# Altium PCB main_board.PcbDoc (part 2 of 3)
Units mm, origin at the board's own origin, x right, y up, seen from the top; angles counter-clockwise.
Board outline 156 x 135 mm, 4 copper layers (Top Side, Ground Plane, Power Plane, Bottom Side), stack 1.602 mm thick; 329 components, 291 nets, 1334 pads, 943 vias.
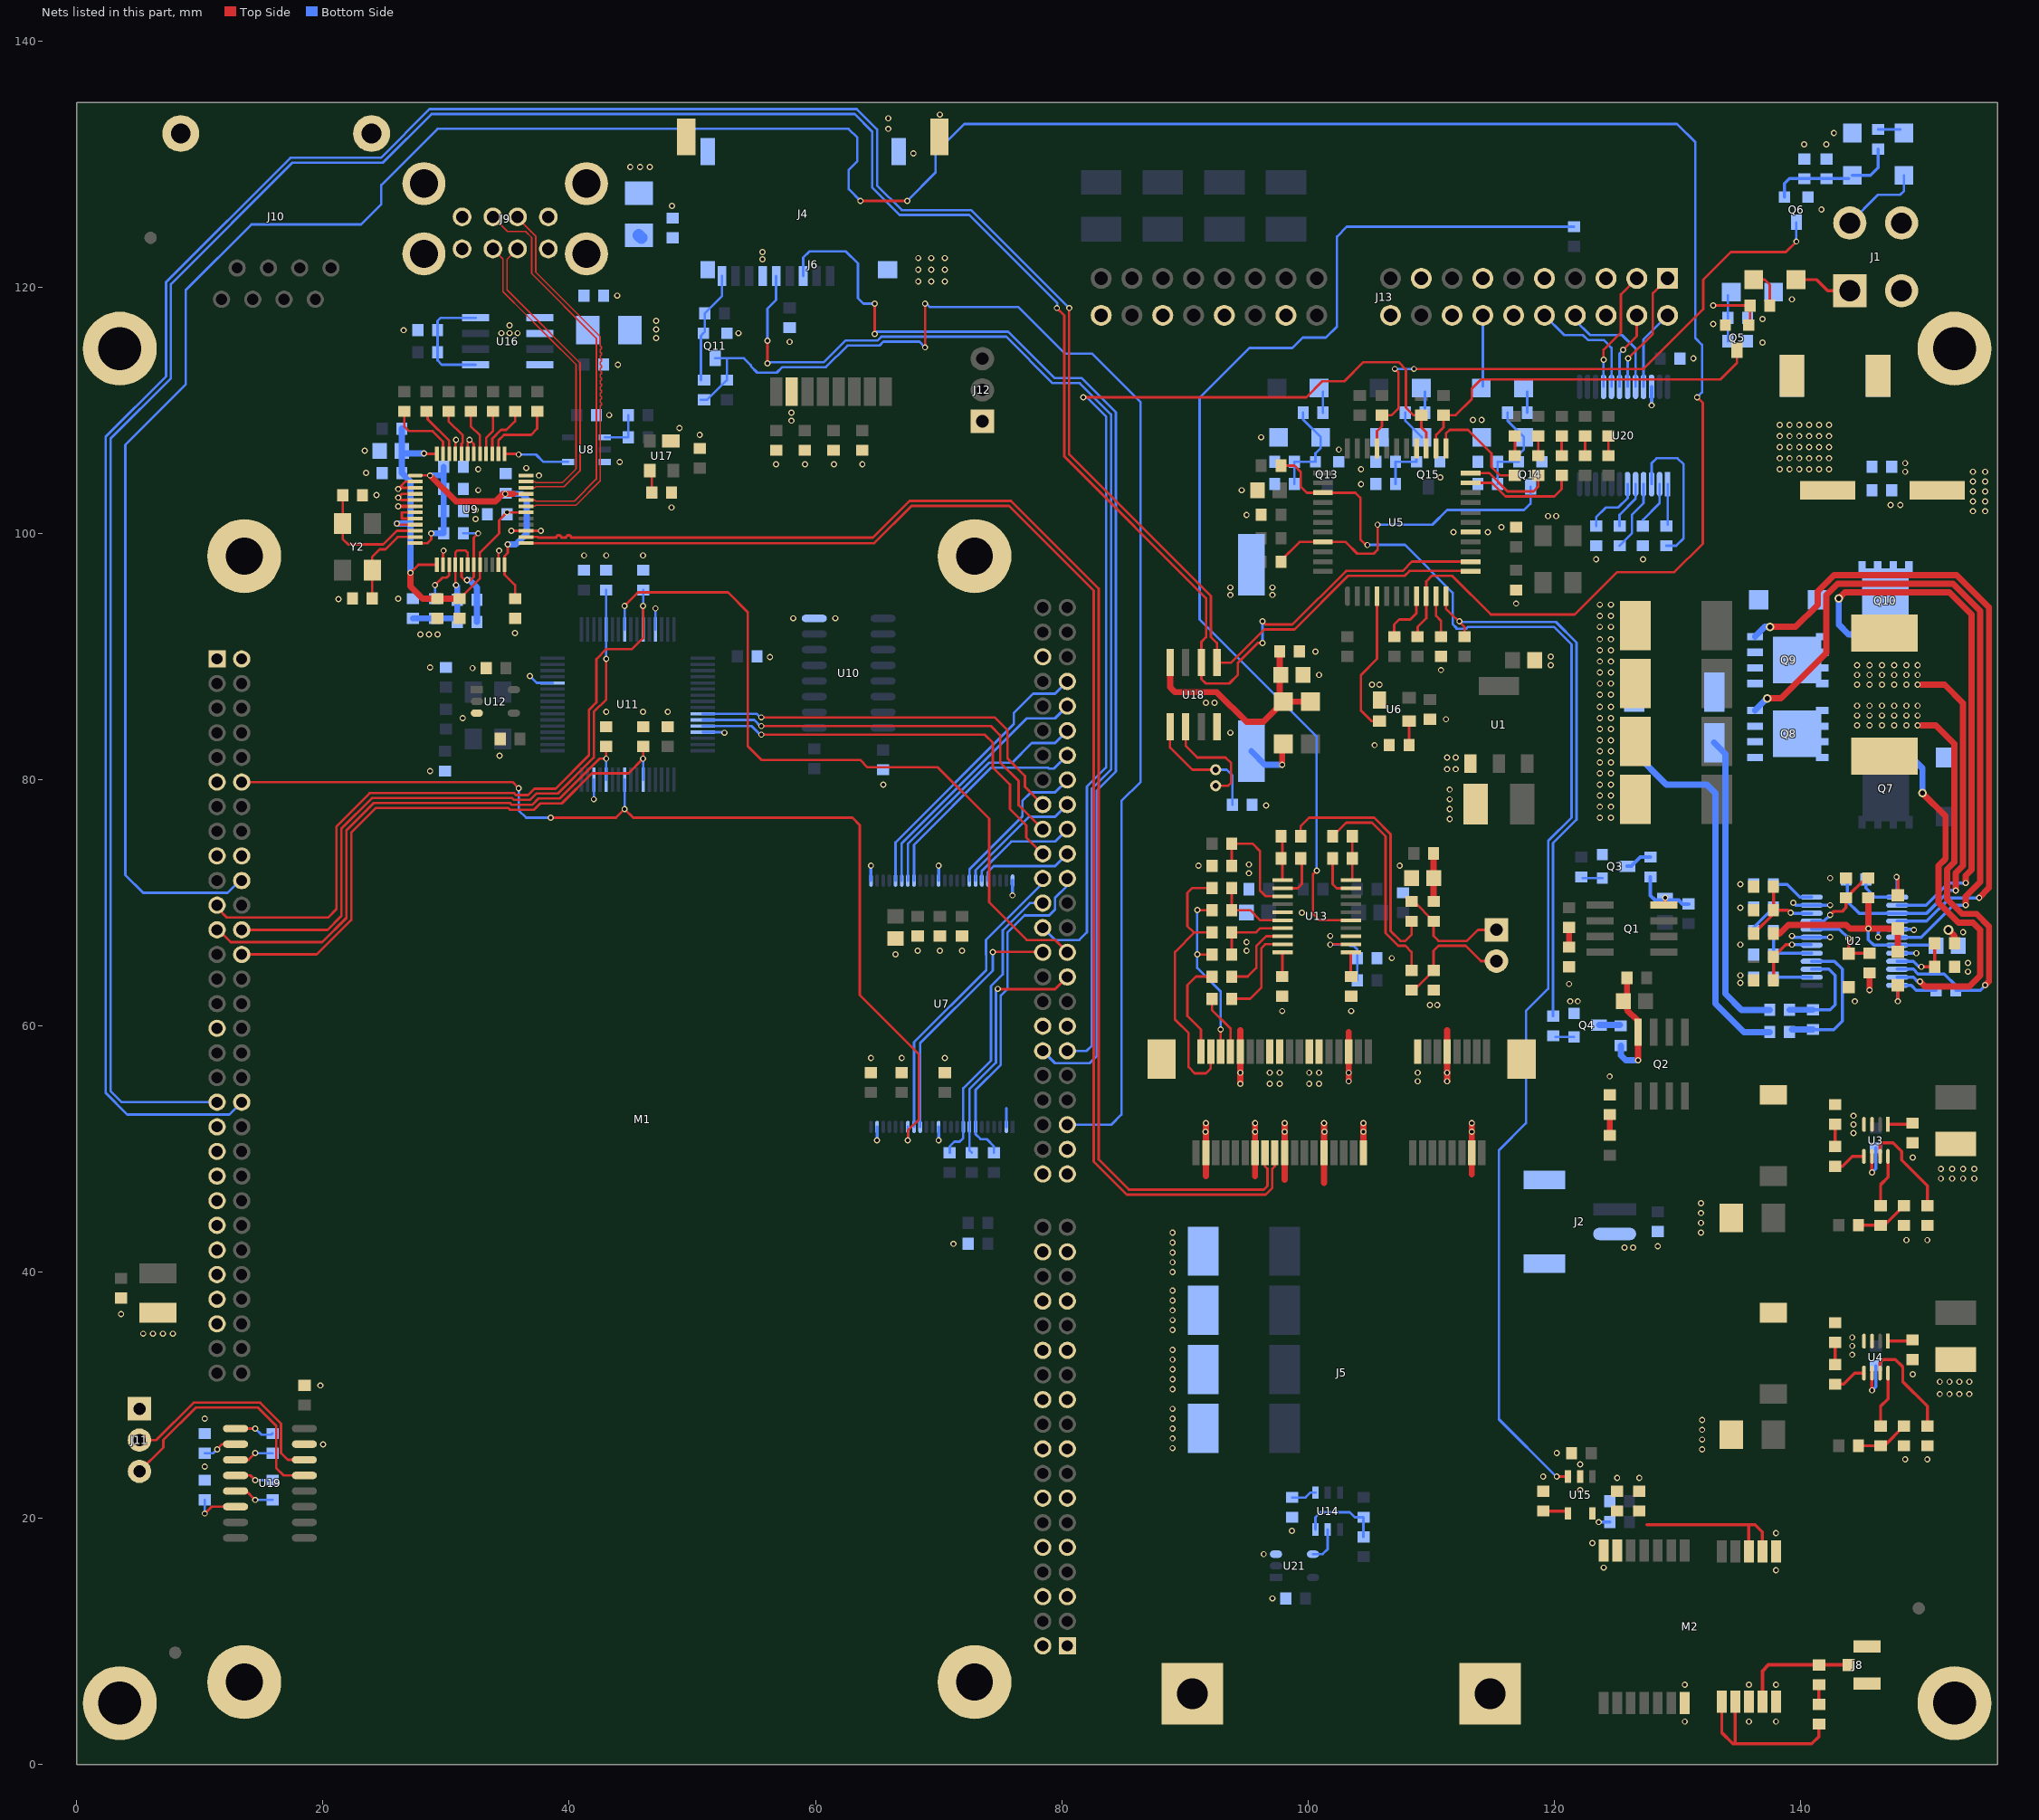
[diagram p4: the nets of this part, all layers, seen from the top]

## Via types
v1: diameter 0.5, hole 0.3, Top Side to Bottom Side, tented both sides, 937 vias
v2: diameter 0.7, hole 0.4, Top Side to Bottom Side, tented both sides, 4 vias
v3: diameter 0.8, hole 0.5, Top Side to Bottom Side, tented both sides, 1 vias
v4: diameter 0.5, hole 0.3, Top Side to Bottom Side, 1 vias

## Nets (pads, with @x,y where several pads share a name; then routed paths per layer and width w, separated by ;. In a path a pad name is that pad's centre, name@x,y a point inside that pad or via, vN(x,y) a via of type N, cw(c..) or ccw(c..) an arc to the next point about the centre after c; other vN are vias at no path point) (continued)
EBID5: M1.B32 U11.58 | length 32.5
  Top Side w0.2: v1(55.6,85.05) 74.55,85.05 75.6,84 75.6,81.7 77,80.3 77,79.424 M1.B32@78.452,77.972
  Bottom Side w0.2: U11.58@50.85,85.35 55.222,85.35 55.522,85.05 v1(55.6,85.05)
EBID6: M1.B30 U11.59 | length 33.7
  Top Side w0.2: v1(55.6,84.35) 74.25,84.35 75,83.6 75,81.4 76.5,79.9 76.5,77.924 M1.B30@78.452,75.972
  Bottom Side w0.2: U11.59@50.85,84.85 55.022,84.85 55.522,84.35 v1(55.6,84.35)
EBID7: M1.B28 U11.60 | length 34.8
  Top Side w0.2: v1(55.6,83.65) 73.75,83.65 74.4,83 74.4,81 75.8,79.6 75.8,77.6 77.124,76.276 77.124,75.3 M1.B28@78.452,73.972
  Bottom Side w0.2: U11.60@50.85,84.35 54.822,84.35 55.522,83.65 v1(55.6,83.65)
EBIOE: M1.B19 U11.40 | length 60.8
  Top Side w0.2: v1(44.5,94.1) 45.6,95.2 52.9,95.2 54.5,93.6 54.5,82.7 55.6,81.6 63.634,81.6 64.234,81 69.934,81 74.1,76.834 74.1,70.034 77.162,66.972 79.452,66.972 M1.B19@80.452,65.972
  Bottom Side w0.2: U11.40@44.5,92.2 v1(44.5,94.1)
EBIWE: M1.A12 U7.18 U11.9 | length 84.7
  Top Side w0.2: M1.A12@13.4,79.8 35.4,79.8 v1(35.9,79.3) ; v1(38.5,76.9) 43.8,76.9 v1(44.5,77.6) 45.2,76.9 63,76.9 63.6,76.3 63.6,62.5 68.4,57.7 68.4,52.4 67.5,51.5 v1(67.5,50.7)
  Bottom Side w0.2: v1(35.9,79.3) 35.9,77.5 36.5,76.9 v1(38.5,76.9) ; v1(44.5,77.6) U11.9@44.5,80 ; v1(67.5,50.7) U7.18@67.5,51.8
EMPTY: D23.1 J13.14 | length 5.8
  Bottom Side w0.2: D23.1@114.2,111.929 J13.14@114.2,117.7
EMPTY-SIG: Q14.1 R55.2 U5.41 | length 25.6
  Top Side w0.2: R55.2@97.8,97.7 97.8,97.8 99.3,99.3 U5.41@101.2,99.3 103.05,99.3 104,98.35 105.35,98.35 105.65,98.65 v1(105.65,100.7)
  Bottom Side w0.2: v1(105.65,100.7) 110.1,100.7 111.3,101.9 117.55,101.9 118.065,102.415 Q14.1@118.065,103.768
EUARTA-INT: M1.A26 R84.1 U11.6 | length 46.2
  Top Side w0.2: M1.A26@13.4,65.8 19.5,65.8 22.3,68.6 22.3,75.7 24.3,77.7 35.025,77.7 35.175,77.55 37.147,77.55 37.663,78.066 39.397,78.066 41.831,80.5 44.8,80.5 v1(46,81.7) R84.1@46,82.7
  Bottom Side w0.2: U11.6@46,80 v1(46,81.7)
EUARTB-INT: M1.A23 R85.1 U11.12 | length 45.2
  Top Side w0.2: M1.A23@11.4,67.8 11.5,67.8 12.5,66.8 19.934,66.8 21.9,68.766 21.9,75.866 24.134,78.1 35.191,78.1 35.341,77.95 36.981,77.95 37.497,78.466 39.231,78.466 42.466,81.7 v1(43,81.7) R85.1@43,82.7
  Bottom Side w0.2: U11.12@43,80 v1(43,81.7)
EUARTC-INT: M1.A24 R86.1 U11.37 | length 52.7
  Top Side w0.2: M1.A24@13.4,67.8 20.369,67.8 21.5,68.931 21.5,76.031 23.969,78.5 35.357,78.5 35.506,78.35 36.816,78.35 37.331,78.866 39.066,78.866 42,81.8 42,85.5 43,86.5 v1(43,89.8)
  Bottom Side w0.2: v1(43,89.8) U11.37@43,92.2 R86.1@43,95.4
EUARTD-INT: M1.A21 R87.1 U11.43 | length 58.6
  Top Side w0.2: M1.A21@11.4,69.8 11.4,69.6 12.2,68.8 20.4,68.8 21.1,69.5 21.1,76.197 23.803,78.9 35.522,78.9 35.672,78.75 36.65,78.75 37.166,79.266 38.9,79.266 41.6,81.966 41.6,85.666 42.2,86.266 42.2,89.778 43.022,90.6 45.1,90.6 46,91.5 v1(46,94.1)
  Bottom Side w0.2: U11.43@46,92.2 v1(46,94.1) R87.1@46,95.4
EXTUSB1_N: J5.36 U9.25 | length 115.4
  Top Side w0.2: U9.25@36.5,99.2 64.766,99.2 67.8,102.234 75.716,102.234 82.6,95.35 82.6,48.984 85.284,46.3 96.566,46.3 97.1,46.834 97.1,48.4 97.3,48.6 J5.36@97.3,49.7
EXTUSB1_P: J5.38 U9.26 | length 115.1
  Top Side w0.2: U9.26@36.5,99.7 37.422,99.7 37.472,99.65 38.95,99.65 cw(c39.15,99.65) 39.35,99.65 39.75,99.65 cw(c39.95,99.65) 40.15,99.65 40.55,99.65 40.95,99.65 41.35,99.65 41.75,99.65 42.15,99.65 42.55,99.65 42.95,99.65 43,99.65 64.65,99.65 67.634,102.634 75.881,102.634 83,95.516 83,49.15 85.45,46.7 94.15,46.7 96.4,46.7 96.7,47 96.7,48.4 96.5,48.6 J5.38@96.5,49.7
EXTUSB3_N: J9.6 U9.31 | length 32.1
  Top Side w0.127: J9.6@35.8,125.7 35.8,125.63 37.277,124.153 37.277,123.527 37.275,123.525 37.275,121.226 42.527,115.973 42.527,115.2 cw(c42.496,115.073) 42.527,114.946 42.527,114.692 cw(c42.496,114.565) 42.527,114.438 42.527,114.184 cw(c42.496,114.057) 42.527,113.93 42.527,113.676 cw(c42.496,113.549) 42.527,113.422 42.527,113.168 cw(c42.496,113.041) 42.527,112.914 42.527,112.66 cw(c42.496,112.533) 42.527,112.406 42.527,112.152 cw(c42.496,112.025) 42.527,111.898 42.527,111.644 cw(c42.496,111.517) 42.527,111.39 42.527,111.136 cw(c42.496,111.009) 42.527,110.882 42.527,110.628 cw(c42.496,110.501) 42.527,110.374 42.527,110.12 42.527,109.866 42.527,109.612 42.527,109.358 42.527,109.104 42.527,108.85 42.527,108.596 42.527,108.4 42.527,104.265 40.549,102.287 37.286,102.287 37.2,102.2 U9.31@36.5,102.2
EXTUSB3_P: J9.7 U9.32 | length 32.1
  Top Side w0.127: J9.7@33.8,125.7 34.977,124.523 36.445,124.523 36.95,124.018 36.948,124.015 36.948,121.09 36.95,121.088 42.2,115.838 42.2,104.4 40.414,102.614 37.286,102.614 37.2,102.7 U9.32@36.5,102.7
EXTUSB4_N: J9.2 U9.34 | length 25.8
  Top Side w0.127: J9.2@35.8,123.1 34.95,122.25 34.95,119.762 36.111,118.601 40.877,113.835 40.877,105.078 39.585,103.787 37.286,103.787 37.2,103.7 U9.34@36.5,103.7
EXTUSB4_P: J9.3 U9.35 | length 25.2
  Top Side w0.127: J9.3@33.8,123.1 34.623,122.277 34.623,119.627 36.548,117.702 37.626,116.624 38.137,116.113 40.55,113.7 40.55,105.214 39.45,104.114 37.286,104.114 37.2,104.2 U9.35@36.5,104.2
FLASH-DB0: M1.B41 U7.29 | length 23
  Bottom Side w0.2: U7.29@66.5,71.8 66.5,74.897 76.1,84.497 76.1,85.4 77.672,86.972 79.452,86.972 M1.B41@80.452,87.972
FLASH-DB1: M1.B39 U7.30 | length 21.1
  Bottom Side w0.2: U7.30@67,71.8 67,74.831 77.141,84.972 79.452,84.972 M1.B39@80.452,85.972
FLASH-DB2: M1.B37 U7.31 | length 19.7
  Bottom Side w0.2: U7.31@67.5,71.8 67.5,74.766 74.106,81.372 75.972,81.372 77.572,82.972 78.038,82.972 79.452,82.972 M1.B37@80.452,83.972
FLASH-DB3: M1.B35 U7.32 | length 18.4
  Bottom Side w0.2: U7.32@68,71.8 68,74.7 74.272,80.972 78.866,80.972 78.938,80.9 79.38,80.9 M1.B35@80.452,81.972
FLASH-DB4: M1.B33 U7.41 | length 12.6
  Bottom Side w0.2: U7.41@72.5,71.8 72.5,72.697 76.8,76.997 76.8,78.266 77.506,78.972 79.452,78.972 M1.B33@80.452,79.972
FLASH-DB5: M1.B31 U7.42 | length 10.5
  Bottom Side w0.2: U7.42@73,71.8 73,72.631 77.341,76.972 79.452,76.972 M1.B31@80.452,77.972
FLASH-DB6: M1.B29 U7.43 | length 9.1
  Bottom Side w0.2: U7.43@73.5,71.8 73.5,72.566 75.906,74.972 79.452,74.972 M1.B29@80.452,75.972
FLASH-DB7: M1.B27 U7.44 | length 7.8
  Bottom Side w0.2: U7.44@74,71.8 74,72.5 74.472,72.972 79.452,72.972 M1.B27@80.452,73.972
GND: BT1.2 C3.1 C4.1 C5.2 C6.1 C7.1 C8.2 C9.2 C10.2 C11.2 C12.2 C13.2 C17.1 C18.1 C19.2 C21.1 C22.1 C23.1 C24.1 C25.2 C26.2 C28.1 C29.2 C31.2 C32.1 C33.1 C34.1 C35.2 C36.1 C37.1 C38.1 C39.1 C40.2 C41.1 C42.1 C43.1 C44.1 C45.1 C46.1 C47.1 C48.1 C49.1 C50.1 C51.1 C52.1 C53.1 C54.1 C55.1 C56.1 C57.1 C58.1 C59.1 C62.1 C63.1 C64.1 C65.1 C66.2 C67.2 C68.1 C69.1 C70.1 C71.1 C72.2 C73.1 C74.1 C75.2 C76.2 C77.2 C78.2 C79.2 C80.2 C81.2 C82.2 C83.2 C86.2 C87.2 C88.1 C90.1 C91.1 C96.2 C97.2 C98.2 C99.2 C100.2 C101.1 C102.2 C103.2 C104.2 C105.2 C106.2 C107.2 C108.2 C109.2 C111.2 C112.2 C114.2 C118.2 C120.2 C124.2 C125.2 C126.2 D2.2 D3.2 D4.2 D6.2 D8.2 D11.2 D22.2 D24.2 D26.2 Designator1. Designator2. Designator3. Designator4. J1.4 J2. J2.1 J4. J4.6 J4.10 J5. J5.4 J5.9 J5.15 J5.18 J5.21 J5.26 J5.27 J5.29 J5.34 J5.35 J5.37 J5.40 J5.43 J5.50 J5.M5 J5.M6 J6.4 J6.@49.51,132.2 J6.@70.06,132.2 J8.2 J8.3 J9.4 J9.8 J9.9 J9.10 J9.11 J9.12 J10.9 J10.10 J11.1 J12.1 J13.5 J13.6 J13.9 J13.12 J13.13 J13.16 J13.17 J13.20 J13.24 J13.28 J13.32 J13.36 L6.2 L11.2 M1.A1 M1.A2 M1.A11 M1.A17 M1.A18 M1.A31 M1.A39 M1.A41 M1.A43 M1.A45 M1.A47 M1.A49 M1.A51 M1.A53 M1.A55 M1.B1 M1.B2 M1.B3 M1.B44 M1.C1 M1.C2 M1.C5 M1.C6 M1.C9 M1.C10 M1.C13 M1.C14 M1.C17 M1.C18 M1.C21 M1.C22 M1.C25 M1.C26 M1.C29 M1.C30 M1.C33 M1.C34 M1.M1 M1.M2 M1.M3 M1.M4 M2.7 M2.10 M2.12 M2.13 M2.24 Q3.3 Q4.3 Q5.3 Q6.3 Q11.3 Q13.3 Q14.3 Q15.3 R8.1 R14.2 R16.2 R22.2 R24.1 R27.2 R28.1 R30.1 R33.1 R35.2 R39.2 R57.2 R66.1 R84.2 R85.2 R86.2 R87.2 R91.1 R92.2 R99.2 R108.2 R112.1 R114.2 R116.2 R118.2 R120.2 U1.1 U2.7 U2.11 U2.17 U2.20 U3.4 U4.4 U5.16 U6.1 U7.2 U7.13 U7.23 U7.25 U7.36 U7.48 U8.3 U9.2 U9.3 U9.4 U9.5 U9.6 U9.14 U9.23 U9.27 U9.36 U9.42 U9.43 U9.45 U10.8 U11.14 U11.28 U11.45 U11.61 U12.3 U13.3 U13.15 U15.2 U16.6 U17.1 U18.4 U19.15 U20.22 U21.3 | length 110.9
  Top Side w0.2: U9.5@27.5,102.7 26.3,102.7 v1(26.1,102.9) 26.4,103.2 U9.4@27.5,103.2 ; U9.3@27.5,103.7 26.2,103.7 26.7,104.2 U9.2@27.5,104.2 ; U9.14@29.75,97.45 v1@29.75,98.55 ; U9.45@30.75,106.45 30.75,107.55 v1(30.8,107.6) ; U9.43@31.75,106.45 31.75,107.45 v1(31.9,107.6) 32.25,107.25 U9.42@32.25,106.45 ; U9.23@34.25,97.45 v1@34.25,98.55 ; v1(35.3,100.2) U9.27@36.5,100.2 v1(37.7,100.2)
  Top Side w0.3: v1(26.1,102.2) U9.6@27.5,102.2
  Top Side w0.5: 91.7,47.8 J5.50@91.7,49.7 v1(91.7,52.1) ; v1@94.5,55.4 J5.43@94.5,57.9 94.5,59.65 ; 95.7,47.8 J5.40@95.7,49.7 v1(95.7,52.1) ; 98.1,47.5 J5.34@98.1,49.7 v1(98.1,52.1) ; 101.3,47.25 J5.26@101.3,49.7 v1(101.3,52.1) ; v1(103.3,55.5) J5.21@103.3,57.9 103.3,59.5 ; J5.18@104.5,49.7 v1(104.5,52.1) ; v1(111.3,55.5) v1(111.3,56.2) J5.9@111.3,57.9 111.3,59.65 ; 113.3,47.95 J5.4@113.3,49.7 v1(113.3,51.4) v1(113.3,52.1)
  Bottom Side w0.2: v1(36.8,88.4) 37.35,87.85 U11.28@38.65,87.85 ; v1(42,78.4) U11.14@42,80 ; U11.45@47,92.2 v1(47,93.9) ; U11.61@50.85,83.85 52.55,83.85 v1(52.6,83.8)
  Bottom Side w0.254: U7.25@64.5,71.8 v1(64.5,73) ; v1(65,50.7) U7.23@65,51.8 ; v1(70,50.7) U7.13@70,51.8 ; U7.36@70,71.8 v1(70,73) ; U7.2@75.5,51.8 75.5,53.3 ; v1(76,70.6) U7.48@76,71.8 ; v1(139.3,67.3) 139.4,67.2 U2.7@140.9,67.2 v1(142.4,67.2) ; v1(139.4,70) 139.6,69.8 U2.11@140.9,69.8 v1(142.4,69.8) ; v1(146.3,67.2) 146.3,67.6 146.55,67.85 U2.17@147.85,67.85 149.15,67.85 v1(149.2,67.8) ; U2.20@147.85,65.9 v1(149.4,65.9)
  Bottom Side w0.3: v1(127.9,110.4) U20.22@127.9,111.9
  Bottom Side w0.508: R30.1@126.5,83 126.5,82.2 129.1,79.6 132.4,79.6 133.1,78.9 133.1,61.8 135.4,59.5 R24.1@137.5,59.5
  other v1: 130.6,3.5 135.8,3.5 138,3.5 130.6,6.5 135.8,6.5 138,6.5 97.1,13.5 138,15.8 124,16 96.4,17.1 123.1,18 138,18.8 98.7,19 122.1,22.3 125.1,23.3 126.9,23.3 119.1,23.4 10.4,24.2 122.1,24.4 148.5,24.8 150.3,24.8 120.2,25.3 132,25.6 89,25.7 20,26 132,26.4 89,26.5 132,27.2 89,27.3 132,28 10.4,28.1 89,28.1 89,28.9 151.3,30.1 152.1,30.1 152.9,30.1 153.7,30.1 89,30.5 19.8,30.8 151.3,31.1 152.1,31.1 152.9,31.1 153.7,31.1 89,31.3 149.1,31.7 89,32.1 89,32.9 144.2,33.3 89,33.7 144.2,34 144.2,34.7 5.4,35 6.2,35 7,35 7.8,35 89,35.3 89,36.1 3.6,36.6 89,36.9 89,37.7 89,38.5 89,40 89,40.8 89,41.6 125.7,42 126.4,42 128.4,42.1 71.2,42.3 89,42.4 148.6,42.6 150.3,42.6 89,43.2 131.9,43.2 131.9,44 131.9,44.8 131.9,45.6 151.4,47.6 152.3,47.6 153.2,47.6 154.1,47.6 151.4,48.4 152.3,48.4 153.2,48.4 154.1,48.4 149.1,49.3 144.3,51.3 91.665,51.4 95.7,51.4 98.1,51.4 101.335,51.4 104.5,51.4 144.3,52 144.3,52.7 94.5,55.3 96.9,55.3 97.7,55.3 100.1,55.3 100.9,55.3 108.9,55.5 124.5,55.9 94.5,56.2 96.9,56.2 97.7,56.2 100.1,56.2 100.9,56.2 103.3,56.2 108.9,56.2 64.5,57.4 67,57.4 70.5,57.4 97.9,61.2 103.5,61.2 109.9,61.7 110.5,61.7 121.3,62 121.9,62 144.4,62 121.2,63.4 135.1,63.5 135.1,64.1 153.6,64.4 153.6,65.1 106.8,65.5 66.5,65.8 68.3,66.1 70.1,66.1 71.9,66.1 95,66.1 135.1,66.6 95,66.8 101.8,67.3 153.2,67.6 99.5,69.2 135.1,69.6 135.1,71.5 142.4,72 95.2,72.4 91.1,73 107.45,73 95.2,73.1 111.5,76.8 123.7,76.9 124.6,76.9 111.5,77.6 123.7,77.8 124.6,77.8 96.6,77.9 111.5,78.4 123.7,78.7 124.6,78.7 111.5,79.2 65.5,79.6 123.7,79.6 124.6,79.6 123.7,80.5 124.6,80.5 28.7,80.7 111.3,80.85 112,80.85 123.7,81.4 124.6,81.4 111.3,81.8 112,81.8 34.35,81.95 123.7,82.3 124.6,82.3 105.4,82.8 123.7,83.2 124.6,83.2 93.7,83.8 123.7,84.1 124.6,84.1 111.2,84.9 31.35,85 123.7,85 124.6,85 43,85.5 46,85.5 48,85.5 123.7,85.9 124.6,85.9 91.7,86.25 92.4,86.25 123.7,86.9 124.6,86.9 105.2,87.7 105.8,87.7 123.7,87.8 124.6,87.8 100.9,88.5 123.7,88.7 124.6,88.7 110.8,88.9 32.15,89.05 28.7,89.1 119.7,89.3 123.7,89.6 124.6,89.6 56.3,89.95 119.7,90 100.6,90.4 123.7,90.5 124.6,90.5 123.7,91.4 124.6,91.4 27.9,91.8 28.6,91.8 29.3,91.8 35.6,91.9 123.7,92.4 124.6,92.4 58.2,93.1 61.6,93.1 123.7,93.3 124.6,93.3 123.7,94.2 124.6,94.2 116.9,94.3 21.25,94.65 26.1,94.7 93.7,95 97.1,95 93.7,95.6 97.1,95.6 123.4,97.9 127.2,97.9 41.2,98.2 43,98.2 46,98.2 29.8,98.6 34.3,98.6 111.8,100.1 114.6,100.1 115.7,100.5 32.4,101.15 119.5,101.4 120.15,101.4 95,101.5 154,101.8 155,101.8 32.4,101.9 48.3,102.1 147.3,102.3 148.1,102.3 154,102.6 155,102.6 24.35,103.1 154,103.4 155,103.4 32.6,103.5 94.6,103.5 26.1,103.6 104.3,104 154,104.2 155,104.2 110.75,104.55 37.55,104.7 23.5,104.9 148.5,105 154,105 155,105 32.6,105.2 104.3,105.2 36.5,105.3 56.8,105.6 59.15,105.6 61.5,105.6 63.8,105.6 148.5,105.7 44.1,105.8 23.4,106.7 102.5,106.8 96.2,107.8 50.6,108 48.95,108.55 58.05,109.15 113.4,109.2 114.1,109.2 43.25,109.6 58.05,109.8 43.95,113.7 131.3,114.2 136.9,115.5 57.9,115.55 47.05,115.85 34.5,116.25 35.15,116.25 35.8,116.25 53.75,116.25 26.55,116.5 47.05,116.55 35.15,116.9 132.9,117 47.05,117.25 136.9,117.4 139.3,119 43.9,119.3 68.35,120.45 69.4,120.45 70.5,120.45 68.35,121.4 69.4,121.4 70.5,121.4 55.7,122.25 68.35,122.35 69.4,122.35 70.5,122.35 55.7,122.85 141.7,126.3 48.35,126.6 44.95,129.75 45.75,129.75 46.55,129.75 67.95,130.85 140.3,131.6 142.1,131.6 142.7,132.5 65.9,132.85 65.9,133.7 70.1,134
GPRS-RXD: M1.B13
GPRS-TXD: M1.B14
GPS-LED: U5.26
GPS-PWR: C97.1 C99.1 M2.14 M2.15 M2.23 R111.2 U15.5 | length 14.3
  Top Side w0.254: 127.5,19.5 135.8,19.5 ; M2.15@135.8,17.3 135.8,19.5 ; M2.14@136.9,17.3 136.9,18.9 136.3,19.5 135.8,19.5
  Bottom Side w0.254: v4(123.6,19.7) R111.2@124.5,19.7
GPS-PWR-CTRL: R51.2 U5.36 U15.3 | length 106.9
  Top Side w0.2: R51.2@97.8,105.5 98.9,105.5 99.4,105 99.4,103.8 99.9,103.3 U5.36@101.2,103.3 103.85,103.3 104.25,102.9 104.25,99.522 104.722,99.05 v1(104.816,99.05) ; v1(120.2,23.4) U15.3@121.1,23.4
  Bottom Side w0.2: v1(104.816,99.05) 104.833,99.067 107.867,99.067 111.75,95.184 111.75,92.622 112.05,92.322 112.05,92.25 112.85,92.25 113,92.4 119.969,92.4 121.4,90.969 121.4,76.916 119.5,75.016 119.5,63 117.7,61.2 117.7,52.1 115.5,49.9 115.5,28.05 120.15,23.4 v1(120.2,23.4)
HAND-IN: M1.A20 R46.2 U5.9 | length 263.2
  Top Side w0.2: v1(63.65,127) v1(67.45,127) ; R46.2@108.9,91.6 108.9,92.4 109.6,93.1 U5.9@109.6,94.9 109.6,96.1 110.05,96.55 111.7,96.55 114.85,93.4 121.65,93.4 125.1,96.85 129.75,96.85 132.05,99.15 132.05,110.6 v1(131.6,111.05)
  Bottom Side w0.2: M1.A20@13.4,71.8 13.25,71.8 12.25,70.8 5.4,70.8 3.95,72.25 3.95,107.187 8.85,112.087 8.85,119.737 14.19,125.078 23.089,125.078 24.742,126.731 24.742,128.28 29.313,132.85 62.687,132.85 63.4,132.137 63.4,130.216 62.7,129.516 62.7,127.95 v1(63.65,127) ; v1(67.45,127) 69.75,129.3 69.75,130.919 72.081,133.25 129.969,133.25 131.45,131.769 131.45,115.869 132,115.319 132,111.45 v1(131.6,111.05)
HAND-OUT: M1.B22 R45.2 U5.25 | length 84.4
  Top Side w0.2: v1(81.75,111.05) 99.85,111.05 101.15,112.35 102.95,112.35 104.5,113.9 107.35,113.9 107.95,113.3 107.95,110.2 108.55,109.6 R45.2@109.2,109.6 109.2,108.6 109.6,108.2 U5.25@109.6,106.9
  Bottom Side w0.2: M1.B22@78.452,67.972 79.452,66.972 81.422,66.972 82.05,67.6 82.05,79.432 83.6,80.982 83.6,109.492 82.042,111.05 v1(81.75,111.05)
HDD-LOCK: R57.1 U5.10 | length 3.5
  Top Side w0.2: U5.10@110.4,94.9 110.4,93.3 110.8,92.9 R57.1@110.8,91.6
HUB-RST: U8.4 U9.37 | length 5.4
  Top Side w0.2: U9.37@34.75,106.45 35.85,106.45 v1(35.9,106.4)
  Bottom Side w0.2: v1(35.9,106.4) 37.3,106.4 37.9,105.8 U8.4@39.9,105.8
I2C-SCL: M1.A37 U5.13 U18.6 | length 227
  Top Side w0.2: v1(79.6,118.3) 80.2,117.7 80.2,106.25 91.716,94.734 91.716,91.566 91.335,91.185 U18.6@91.335,89.5 91.335,88.165 91.7,87.8 93.6,87.8 94.308,88.508 94.308,89.492 95.916,91.1 v1(96.3,91.1) ; v1(96.3,92.85) 96.55,92.6 98.734,92.6 103.084,96.95 107.684,96.95 108.434,97.7 U5.13@113.2,97.7
  Bottom Side w0.2: M1.A37@11.4,53.8 3.666,53.8 2.75,54.716 2.75,107.684 7.65,112.584 7.65,120.234 17.516,130.1 24.866,130.1 28.816,134.05 63.184,134.05 64.6,132.634 64.6,128.084 66.834,125.85 72.484,125.85 79.641,118.693 79.641,118.341 v1(79.6,118.3) ; v1(96.3,91.1) v1(96.3,92.85)
I2C-SDA: M1.A38 U5.12 U18.5 | length 226.1
  Top Side w0.2: v1(80.6,118.3) 80.6,106.416 92.116,94.9 92.116,91.584 92.605,91.095 U18.5@92.605,89.5 93.75,89.5 96.45,92.2 98.9,92.2 103.25,96.55 107.85,96.55 108.25,96.95 113.15,96.95 U5.12@113.2,96.9
  Bottom Side w0.2: M1.A38@13.4,53.8 12.4,52.8 4.1,52.8 2.35,54.55 2.35,107.85 7.25,112.75 7.25,120.4 17.35,130.5 24.7,130.5 28.65,134.45 63.35,134.45 65,132.8 65,128.25 67,126.25 72.65,126.25 v1(80.6,118.3)
IGN-SIG: Q5.1 R49.2 U5.24 | length 30.1
  Top Side w0.2: U5.24@110.4,106.9 110.4,108 111,108.6 R49.2@111,109.6 112,109.6 113.3,110.9 113.3,111.75 114.05,112.5 133.5,112.5 134.835,113.835 Q5.1@134.835,114.868
INTVCC: C26.1 D9.1 D13.1 R31.1 R34.2 U2.19 | length 21.5
  Top Side w0.5: R34.2@137.8,67.5 138.3,67.5 139,68.2 143.7,68.2 144,67.9 v1(145.5,67.9) ; R31.1@145.5,70.4 v1(145.5,67.9) ; D9.1@147.9,66 D13.1@147.9,67.9 v1(145.5,67.9)
  Bottom Side w0.254: v1(145.5,67.9) 145.5,67 145.95,66.55 U2.19@147.85,66.55 150.95,66.55 C26.1@151,66.5
IR: R58.1 U5.8 | length 4.6
  Top Side w0.2: R58.1@107,91.6 107,92.6 107.4,93 108.3,93 108.8,93.5 U5.8@108.8,94.9
LINSEL: R106.1 R108.1 U13.13 | length 9.6
  Top Side w0.2: R108.1@93.8,73 R106.1@93.8,74.8 95.5,74.8 96.1,74.2 96.1,71 96.575,70.525 U13.13@97.925,70.525
MAIN-PWR: R12.1 R47.2 U5.11 | length 45.3
  Top Side w0.2: U5.11@111.2,94.9 111.2,93.9 112.7,92.4 R47.2@112.7,91.6
  Bottom Side w0.2: v1(112.3,92.85) 112.35,92.8 120.134,92.8 121.8,91.134 121.8,76.75 119.9,74.85 R12.1@119.9,60.8
MIC_N: C85.1 R100.2 | length 17.3
  Top Side w0.2: R100.2@102,75.4 103.1,76.5 105.2,76.5 106.3,75.4 106.3,67.534 107.334,66.5 107.9,66.5 108.4,66 C85.1@108.4,64.5
MIC_P: C84.1 R104.2 | length 20.1
  Top Side w0.2: R104.2@99.4,75.4 99.4,76.2 100.1,76.9 105.366,76.9 106.7,75.566 106.7,67.7 107.5,66.9 107.9,66.9 108.4,67.4 C84.1@108.4,68.5
NAND-ALE: M1.B26 U7.17 | length 24.5
  Bottom Side w0.2: U7.17@68,51.8 68,58.666 73.867,64.533 73.867,65.755 73.85,65.772 73.85,66.981 78.452,71.583 M1.B26@78.452,71.972
NAND-CE: M1.B24 R59.1 U7.9 | length 24.3
  Bottom Side w0.2: R59.1@70.9,49.7 70.9,50.214 71.286,50.6 71.7,50.6 72,50.9 U7.9@72,51.8 72,54.931 74.25,57.181 74.25,63.228 75.2,64.178 75.2,67.766 77.406,69.972 M1.B24@78.452,69.972
NAND-CLE: M1.B20 U7.16 | length 20.7
  Top Side w0.2: v1(74.4,66) 78.424,66 M1.B20@78.452,65.972
  Bottom Side w0.2: U7.16@68.5,51.8 68.5,58.6 74.4,64.5 v1(74.4,66)
NAND-RDY: M1.B25 R61.1 U7.7 | length 27.5
  Bottom Side w0.2: R61.1@74.5,49.7 74.5,50.2 73.9,50.8 73.4,50.8 73,51.2 U7.7@73,51.8 73,54.8 75.05,56.85 75.05,62.472 75.6,63.022 75.6,67.6 77,69 77.028,68.972 78.972,68.972 79.452,69.452 79.452,70.386 80.452,71.386 M1.B25@80.452,71.972
NAND-RE: M1.B17 R60.1 U7.8 | length 20.4
  Top Side w0.2: v1(74.8,63) 74.828,62.972 79.452,62.972 M1.B17@80.452,63.972
  Bottom Side w0.2: R60.1@72.7,49.7 72.5,49.9 U7.8@72.5,51.8 72.5,54.866 74.65,57.016 74.65,62.85 v1(74.8,63)
NetBT1_1: BT1.1 D20.2 | length 4.6
  Top Side w0.5: v1(97.9,81.2) D20.2@97.9,82.8
  Bottom Side w0.5: BT1.1@95.4,82.3 96.5,81.2 v1(97.9,81.2)
NetC1_1: C1.1 Q1.4 R1.1 R5.2 | length 5.4
  Top Side w0.3: Q1.4@129,69.905 v1(129,70.4)
  Bottom Side w0.3: R5.2@127.8,72.1 127.8,70.6 128.2,70.2 C1.1@129,70.2 130.1,70.2 130.4,69.9 R1.1@130.9,69.9
NetC2_1: C2.1 Q2.4 R2.1 R6.2 | length 9.4
  Top Side w0.5: R2.1@125.9,63.9 125.9,61.3 126.795,60.405 Q2.4@126.795,59.5 126.8,59.495 v1(126.8,57.2)
  Bottom Side w0.5: R6.2@125.4,58.4 125.4,57.6 125.8,57.2 v1(126.8,57.2)
NetC8_1: C8.1 D6.1 Q5.2 R13.1 R14.1 | length 9.5
  Top Side w0.2: v1(132.9,118.5) R13.1@135.9,118.5 135.9,117 Q5.2@135.8,116.9
  Bottom Side w0.2: v1(132.9,118.5) 134.014,118.5 ; C8.1@134.1,115.6 R14.1@134.1,117.5 D6.1@134.1,119.329
NetC9_1: C9.1 D8.1 Q6.2 R15.1 R16.1 | length 10.4
  Bottom Side w0.254: Q6.2@138.7,127.3 138.7,128.4 139.1,128.8 C9.1@140.3,128.8 R16.1@142.1,128.8 D8.1@143.929,128.8 ; D8.1@144.2,129.071 145.671,129.071 146.3,129.7 R15.1@146.3,131.2
NetC14_2: C14.2 R7.2 U14.6 | length 6.8
  Bottom Side w0.2: U14.6@100.6,19.1 100.6,20.1 101,20.5 103.4,20.5 103.8,20.1 C14.2@104.5,20.1 R7.2@104.5,18.5
NetC15_1: C15.1 L1.1 U3.3
NetC15_2: C15.2 R17.1 | length 1.8
  Top Side w0.254: R17.1@142.8,50.2 C15.2@142.8,52
NetC16_1: C16.1 D10.1 L2.1 Q7.1 Q7.2 Q7.3 Q8. Q8.5 Q8.6 Q8.7 Q8.8 U2.22 | length 33.3
  Top Side w0.5: 149.8,84.4 150.988,84.4 152.48,82.908 152.48,73.29 151.9,72.71 151.9,70.304 153.108,69.096 154.304,69.096 155.3,68.1 155.3,63.6 v1(155,63.3)
  Bottom Side w0.254: U2.22@147.85,64.6 149.158,64.6 149.535,64.223 151.677,64.223 C16.1@152.677,63.223 ; C16.1@152.6,62.9 154.6,62.9 154.923,63.223 v1(155,63.3)
  other v1: 144.6,84.4 145.6,84.4 146.6,84.4 147.6,84.4 148.6,84.4 149.5,84.4 144.6,85.2 145.6,85.2 146.6,85.2 147.6,85.2 148.6,85.2 149.5,85.2 144.6,86 145.6,86 146.6,86 147.6,86 148.6,86 149.5,86
NetC16_2: C16.2 D9.2 U2.24 | length 5.9
  Top Side w0.254: v1(147.9,62) D9.2@147.9,63.3
  Bottom Side w0.254: v1(147.9,62) 147.9,63.25 U2.24@147.85,63.3 149,63.3 149.4,62.9 C16.2@151,62.9
NetC17_2: C17.2 U2.2 | length 3
  Bottom Side w0.254: C17.2@137.85,63.95 U2.2@140.9,63.95
NetC20_1: C20.1 R24.2 U2.4 | length 11.4
  Bottom Side w0.254: U2.4@140.9,65.25 142.75,65.25 143.4,64.6 143.4,60.4 142.7,59.7 C20.1@141,59.7
  Bottom Side w0.5: R24.2@139.3,59.7 C20.1@141,59.7
NetC20_2: C20.2 R21.2 U2.3 | length 8.4
  Bottom Side w0.254: U2.3@140.9,64.6 142.3,64.6 142.8,64.1 142.8,61.7 142.4,61.3 C20.2@141,61.3
  Bottom Side w0.5: R21.2@139.1,61.3 C20.2@141,61.3
NetC21_2: C21.2 U3.1 | length 2
  Top Side w0.254: U3.1@147.1,52 149,52 C21.2@149.1,52.1
NetC22_2: C22.2 R25.1 | length 2.6
  Bottom Side w0.254: R25.1@136.2,67.7 136.2,68 C22.2@137.8,69.6
NetC23_2: C23.2 R23.1 U2.21 | length 5.1
  Top Side w0.254: v1(149.8,64.8) C23.2@150.9,64.8 R23.1@150.9,66.7
  Bottom Side w0.254: U2.21@147.85,65.25 149.15,65.25 149.6,64.8 v1(149.8,64.8)
NetC24_2: C24.2 U3.7 | length 8.3
  Top Side w0.254: U3.7@146.45,49.4 146.45,50.35 146.6,50.5 147.5,50.5 148.2,49.8 148.2,49.1 150.3,47 C24.2@150.3,45.4
NetC25_1: C25.1 R25.2 U2.5 | length 4.9
  Bottom Side w0.254: C25.1@137.8,65.8 R25.2@137.8,67.7 ; C25.1@137.9,65.9 U2.5@140.9,65.9
NetC27_1: C27.1 L3.1 U4.3
NetC27_2: C27.2 R32.1 | length 1.8
  Top Side w0.254: R32.1@142.8,32.5 C27.2@142.8,34.3
NetC30_1: C30.1 D12.2 L2.2 Q9. Q9.5 Q9.6 Q9.7 Q9.8 Q10.1 Q10.2 Q10.3 U2.15 | length 31.3
  Top Side w0.5: 149.8,87.7 151.7,87.7 153.18,86.22 153.18,73 152.6,72.42 v1(152.6,71)
  Bottom Side w0.254: C30.1@143.7,71.9 143.8,71.8 143.8,70.1 144.75,69.15 U2.15@147.85,69.15 150.25,69.15 152.1,71 v1(152.6,71)
  other v1: 144.6,87.7 145.6,87.7 146.6,87.7 147.6,87.7 148.6,87.7 149.5,87.7 144.6,88.5 145.6,88.5 146.6,88.5 147.6,88.5 148.6,88.5 149.5,88.5 144.6,89.3 145.6,89.3 146.6,89.3 147.6,89.3 148.6,89.3 149.5,89.3
NetC30_2: C30.2 D13.2 U2.13 | length 6.8
  Top Side w0.254: v1(147.8,72.1) 147.9,72 D13.2@147.9,70.6
  Bottom Side w0.254: C30.2@145.3,71.9 145.3,71.2 146.05,70.45 U2.13@147.85,70.45 147.85,72.05 v1(147.8,72.1)
NetC31_1: C31.1 R34.1 R35.1 U2.10 | length 7.7
  Top Side w0.254: R34.1@136.2,67.5 137.8,69.1 C31.1@137.8,69.4 ; R35.1@137.8,71.3 C31.1@137.8,69.4 ; v1(139.2,69.2) 139,69.4 C31.1@137.8,69.4
  Bottom Side w0.254: v1(139.2,69.2) 139.25,69.15 U2.10@140.9,69.15
NetC32_2: C32.2 U4.1 | length 1.9
  Top Side w0.254: U4.1@147.1,34.4 C32.2@149,34.4
NetC33_2: C33.2 U2.12 | length 3.5
  Bottom Side w0.254: C33.2@137.8,71.5 138.9,71.5 139.95,70.45 U2.12@140.9,70.45
NetC34_2: C34.2 U4.7 | length 8.7
  Top Side w0.254: U4.7@146.45,31.8 146.45,32.65 146.7,32.9 147.7,32.9 148.273,32.327 148.273,32.288 148.3,32.261 148.3,31.1 150.3,29.1 C34.2@150.3,27.5
NetC40_1: C40.1 U6.3 | length 1.9
  Top Side w0.2: C40.1@108.2,82.8 U6.3@108.2,84.75
NetC52_2: C52.2 C53.2 C54.2 C55.2 C56.2 L4.1 U9.9 U9.13 U9.20 U9.30 U9.48 | length 35.5
  Top Side w0.2: v1(26,100.8) 26.1,100.7 U9.9@27.5,100.7 ; v1(27.1,96.8) 27.75,97.45 U9.13@29.25,97.45 ; v1(28.2,106.5) 28.25,106.45 U9.48@29.25,106.45 ; C52.2@29.25,94.75 C52.2@29.3,94.7 ; C53.2@31.1,94.7 32.75,96.35 U9.20@32.75,97.45 32.75,98.45 34.3,100 34.3,101.05 v1(34.95,101.7) U9.30@36.5,101.7
  Top Side w0.5: v1(27.1,96.8) 27.1,95.7 28.1,94.7 C52.2@29.3,94.7 C53.2@31.1,94.7
  Bottom Side w0.5: v1(26,100.8) 27.1,100.8 ; L4.1@26.4,108.5 C55.2@26.4,104.9 27.1,104.2 27.1,100.8 ; C56.2@26.6,106.5 v1(28.2,106.5) ; v1(27.1,96.8) 27.1,100.8
NetC57_2: C57.2 U9.11 Y2.2 | length 7.6
  Top Side w0.2: C57.2@24,94.7 Y2.2@24,97 24,98.1 24.6,98.7 25.066,98.7 26.066,99.7 U9.11@27.5,99.7
NetC58_2: C58.2 U9.10 Y2.1 | length 10.1
  Top Side w0.2: C58.2@21.6,103.1 21.6,99.55 22.05,99.1 24.9,99.1 26,100.2 U9.10@27.5,100.2
NetC59_2: C59.2 C62.2 C63.2 C64.2 C65.2 L5.2 U9.1 U9.12 U9.24 U9.33 | length 31
  Top Side w0.2: U9.12@27.5,99.2 28.5,99.2 28.8,99.5 v1(28.8,100) ; U9.1@27.5,104.7 28.6,104.7 v1(28.7,104.7) ; v1(35,99.1) 35,98.4 34.75,98.15 U9.24@34.75,97.45 34.75,96.65 35.6,95.8 C64.2@35.6,94.7 ; 35.5,103.2 U9.33@36.5,103.2
  Top Side w0.5: v1(28.7,104.7) 30.8,102.6 34,102.6 34.6,103.2 35.5,103.2
  Bottom Side w0.5: v1(28.7,104.7) 29.8,104.7 ; v1(28.8,100) L5.2@29.8,100 C63.2@29.8,101.8 C59.2@29.8,103.6 29.8,104.7 ; C62.2@29.8,105.4 29.8,104.7 ; v1(34.8,103.2) 36.15,103.2 36.55,102.8 36.55,100 35.65,99.1 v1(35,99.1)
NetC60_1: C60.1 C61.1 L6.1 R74.1 U9.16 U9.18 | length 11.1
  Top Side w0.2: v1(30.8,95.8) 30.75,95.85 U9.16@30.75,97.45 30.75,98.45 30.9,98.6 31.6,98.6 31.75,98.45 U9.18@31.75,97.45
  Bottom Side w0.5: L6.1@27.3,93.1 R74.1@29.1,93.1 30.9,93.1 C61.1@30.9,94.6 30.9,95.7 v1(30.8,95.8)
NetC60_2: C60.2 C61.2 L5.1 U9.17 U9.19 | length 11
  Top Side w0.2: U9.17@31.25,97.45 31.25,96.45 31.5,96.2 v1(31.7,96.2) 32,96.2 32.25,96.45 U9.19@32.25,97.45 32.25,99.65 v1(32.6,100)
  Bottom Side w0.2: L5.1@31.4,100 v1(32.6,100)
  Bottom Side w0.5: v1(31.7,96.2) 31.9,96.2 32.5,95.6 C61.2@32.5,94.6 C60.2@32.5,92.8
NetC83_1: C83.1 R90.1 R93.1 | length 3.9
  Top Side w0.5: R93.1@110.2,70.1 C83.1@110.2,72 R90.1@110.2,74
NetC84_2: C84.2 J7.1 R93.2 | length 9.3
  Top Side w0.2: C84.2@108.4,70.1 108.6,70.1 R93.2@110.2,68.5 110.2,67.3 110.6,66.9 112.9,66.9 113.8,67.8 J7.1@115.3,67.8
NetC85_2: C85.2 J7.2 R99.1 | length 9.8
  Top Side w0.2: C85.2@108.4,62.9 108.6,62.9 R99.1@110.2,64.5 110.2,66.1 110.6,66.5 112.8,66.5 114.04,65.26 J7.2@115.3,65.26
NetC93_1: C93.1 U13.5 | length 89.7
  Top Side w0.2: v1(100.7,72.6) 100.4,72.3 100.4,69.1 100.925,68.575 U13.5@103.475,68.575
  Bottom Side w0.2: v1(100.7,72.6) 100.7,83.5 91.2,93 91.2,111.003 95.247,115.05 98.731,115.05 99.581,115.9 101.45,115.9 102.35,116.8 102.35,124.1 103.15,124.9 C93.1@121.6,124.9
NetC100_1: C100.1 U15.4 | length 2.1
  Top Side w0.254: C100.1@119.1,20.6 120.9,20.6 U15.4@121.1,20.4
NetC104_1: C104.1 U17.3 | length 1.6
  Top Side w0.2: C104.1@46.7,103.3 U17.3@46.7,104.95
NetC106_1: C106.1 C107.1 D19.1 D20.1 U18.8 | length 19
  Top Side w0.5: U18.8@88.795,89.5 88.795,87.505 89.2,87.1 92.6,87.1 95,84.7 96.371,84.7 D20.1@98,86.329 D19.1@100.2,86.329 ; D20.1@97.7,86.629 C107.1@97.7,90.4
NetC108_1: C108.1 U18.1 Y4.2 | length 10.1
  Top Side w0.2: U18.1@88.795,84.3 88.795,82.605 90.6,80.8 Y4.2@92.5,80.8
  Bottom Side w0.2: Y4.2@92.5,80.8 93.4,80.8 93.85,80.35 C108.1@93.85,77.95
NetC110_1: C110.1 U19.1 | length 3.2
  Top Side w0.2: U19.1@12.9,27.3 v1(14.5,27.3)
  Bottom Side w0.2: v1(14.5,27.3) 15,26.8 15.8,26.8 C110.1@15.9,26.9
NetC110_2: C110.2 U19.3 | length 3.2
  Top Side w0.2: U19.3@12.9,24.76 13.96,24.76 v1(14.5,25.3)
  Bottom Side w0.2: v1(14.5,25.3) C110.2@15.9,25.3
NetC111_1: C111.1 U19.2 | length 2.8
  Top Side w0.2: v1(11.4,25.6) 11.83,26.03 U19.2@12.9,26.03
  Bottom Side w0.2: C111.1@10.4,25.3 11.1,25.3 v1(11.4,25.6)
NetC112_1: C112.1 U19.6 | length 3.8
  Top Side w0.2: v1(10.4,20.4) 10.95,20.95 U19.6@12.9,20.95
  Bottom Side w0.2: v1(10.4,20.4) C112.1@10.4,21.5
NetC113_1: C113.1 U19.4 | length 3.2
  Top Side w0.2: U19.4@12.9,23.49 14.11,23.49 v1(14.5,23.1)
  Bottom Side w0.2: v1(14.5,23.1) C113.1@15.9,23.1
NetC113_2: C113.2 U19.5 | length 3.3
  Top Side w0.2: U19.5@12.9,22.22 13.78,22.22 v1(14.5,21.5)
  Bottom Side w0.2: v1(14.5,21.5) C113.2@15.9,21.5
NetC116_1: C116.1 U20.3 | length 12.3
  Bottom Side w0.2: U20.3@127.9,104 127.9,105.7 128.3,106.1 130,106.1 130.5,105.6 130.5,99.6 129.9,99 C116.1@129.1,99
NetC116_2: C116.2 U20.1 | length 3.3
  Bottom Side w0.2: C116.2@129.2,100.7 U20.1@129.2,104
NetC118_1: C118.1 U20.2 | length 3.5
  Bottom Side w0.2: 127.2,101.1 128.55,102.45 U20.2@128.55,104
NetC120_1: C120.1 U20.6 | length 5
  Bottom Side w0.2: C120.1@123.4,100.6 123.4,101.3 124.2,102.1 125.2,102.1 125.95,102.85 U20.6@125.95,104
NetC122_1: C122.1 U20.5 | length 3.9
  Bottom Side w0.2: C122.1@125.3,100.6 125.3,101.5 126.6,102.8 U20.5@126.6,104
NetC122_2: C122.2 U20.4 | length 5.8
  Bottom Side w0.2: C122.2@125.3,99 126.3,100 126.3,101.5 127.25,102.45 U20.4@127.25,104
NetC124_1: C124.1 D22.1 Q13.2 R115.1 R116.1 | length 8.3
  Bottom Side w0.2: C124.1@98.9,104 R116.1@98.9,105.8 Q13.2@100.6,105.8 100.6,106.5 101.029,106.929 D22.1@101.029,107.8 99.6,109.229 R115.1@99.6,109.8
NetC125_1: C125.1 D24.1 Q14.2 R117.1 R118.1 | length 8.2
  Bottom Side w0.2: C125.1@115.4,104 R118.1@115.4,105.8 Q14.2@117.1,105.8 117.1,106.4 117.529,106.829 D24.1@117.529,107.8 116.2,109.129 R117.1@116.2,109.8
NetC126_1: C126.1 D26.1 Q15.2 R119.1 R120.1 | length 7.6
  Bottom Side w0.2: C126.1@107.1,104 R120.1@107.1,105.8 Q15.2@108.8,105.8 D26.1@108.8,107.371 ; R119.1@107.9,109.8 107.9,109.129 D26.1@109.229,107.8
NetD1_2: D1.2 J1.3
NetD3_1: D3.1 R3.1 | length 1.6
  Top Side w0.5: D3.1@121.2,66.4 R3.1@121.2,68
NetD4_1: D4.1 R4.1 | length 1.7
  Top Side w0.5: R4.1@124.5,51.1 D4.1@124.5,52.8
NetD5_1: D5.1 J1.1 | length 4.7
  Top Side w0.254: D5.1@139.629,120.6 141.3,120.6 142.2,119.7 J1.1@144,119.7
NetD5_2: D5.2 R13.2 | length 3.2
  Top Side w0.2: D5.2@136.2,120.6 137.1,120.6 137.5,120.2 R13.2@137.5,118.5
NetD7_1: D7.1 J1.2 | length 6.7
  Bottom Side w0.2: J1.2@144,125.2 146.3,127.5 148.1,127.5 148.4,127.8 D7.1@148.4,129.071
NetD7_2: D7.2 R15.2 | length 1.8
  Bottom Side w0.2: R15.2@146.3,132.8 D7.2@148.1,132.8
NetD11_1: D11.1 R29.2 U2.8 | length 6.3
  Top Side w0.254: v1(143.9,67.1) D11.1@143.9,65.85 143.95,65.9 R29.2@145.6,65.9
  Bottom Side w0.254: U2.8@140.9,67.85 143.15,67.85 v1(143.9,67.1)
NetD12_1: D12.1 Q8.1 Q8.2 Q8.3 Q9.1 Q9.2 Q9.3 R21.1 R28.2 R30.2 | length 24.9
  Bottom Side w0.508: R30.2@132.98,83 133.9,82.08 133.9,62.6 135.2,61.3 R21.1@137.5,61.3
NetD14_1: D14.1 R40.2 | length 1.6
  Top Side w0.2: D14.1@124.4,106.3 R40.2@124.4,107.9
NetD15_1: D15.1 R41.2 | length 1.6
  Top Side w0.2: D15.1@122.5,106.3 R41.2@122.5,107.9
NetD16_1: D16.1 R42.2 | length 1.6
  Top Side w0.2: D16.1@120.6,106.3 R42.2@120.6,107.9
NetD17_1: D17.1 R43.2 | length 1.6
  Top Side w0.2: D17.1@118.7,106.3 R43.2@118.7,107.9
NetD18_1: D18.1 R44.2 | length 1.6
  Top Side w0.2: D18.1@116.8,106.3 R44.2@116.8,107.9
NetD21_2: D21.2 R115.2 | length 1.7
  Bottom Side w0.2: R115.2@101.2,109.8 D21.2@101.2,111.5
NetD23_2: D23.2 R117.2 | length 1.7
  Bottom Side w0.2: R117.2@117.8,109.8 D23.2@117.8,111.5
NetD25_2: D25.2 R119.2 | length 1.7
  Bottom Side w0.2: R119.2@109.5,109.8 D25.2@109.5,111.5
NetJ4_9: J4.9 Q11.2 R70.1 R72.2 | length 9
  Bottom Side w0.2: R70.1@50.7,112.45 50.7,116.05 Q11.2@50.9,116.25 ; Q11.2@51,116.35 R72.2@51,117.85 52.4,119.25 J4.9@52.4,120.9
NetJ8_1: J8.1 L12.2 M2.11 | length 9.7
  Top Side w0.296: M2.11@136.9,5.1 136.9,7.6 137.4,8.1 L12.2@141.5,8.1 J8.1@143.9,8.1
NetJ11_2: J11.2 U19.14 | length 18
  Top Side w0.2: J11.2@5.1,26.36 6.46,26.36 9.5,29.4 14.9,29.4 16.6,27.7 16.6,25.3 17.14,24.76 U19.14@18.488,24.76
NetJ11_3: J11.3 U19.13 | length 20.2
  Top Side w0.2: J11.3@5.1,23.82 7.033,25.753 7.033,26.367 9.666,29 14.734,29 16.2,27.534 16.2,24.1 16.81,23.49 U19.13@18.488,23.49
NetL12_1: L12.1 R110.1 | length 1.6
  Top Side w0.254: R110.1@141.5,4.9 L12.1@141.5,6.5
NetM2_8: M2.8 M2.9 R110.2 | length 15.5
  Top Side w0.254: M2.8@133.6,5.1 133.6,2.6 134.5,1.7 134.8,1.7 ; M2.9@134.7,5.1 134.7,1.8 134.8,1.7 ; R110.2@141.5,3.3 141.5,2.3 140.9,1.7 134.8,1.7
NetQ3_1: Q3.1 R5.1 | length 2.2
  Bottom Side w0.3: Q3.1@125.932,72.965 126.265,72.965 127,73.7 R5.1@127.8,73.7
NetQ3_2: Q3.2 R10.2 | length 1.6
  Bottom Side w0.2: R10.2@122.3,72 Q3.2@123.9,72
NetQ4_1: Q4.1 R6.1 | length 1.7
  Bottom Side w0.5: Q4.1@123.632,60.065 R6.1@125.335,60.065
NetQ4_2: Q4.2 R12.2 | length 1.5
  Bottom Side w0.2: R12.2@120.1,59.1 Q4.2@121.6,59.1
NetQ7_4: Q7.4 U2.23 | length 28.9
  Top Side w0.508: v1(149.7,63.6) 150.1,63.2 153.7,63.2 154.596,64.096 154.596,67.808 154.012,68.392 152.817,68.392 151.196,70.013 151.196,73.002 151.776,73.582 151.776,77.024 v2(149.9,78.9)
  Bottom Side w0.254: U2.23@147.85,63.95 149.15,63.95 149.5,63.6 v1(149.7,63.6)
  Bottom Side w0.508: Q7.4@148.81,82 149.9,80.91 v2(149.9,78.9)
NetQ8_4: Q8.4 U2.18 | length 57.3
  Top Side w0.508: v2(137.3,86.6) 138.4,86.6 142.1,90.3 142.1,95 143.008,95.908 152.393,95.908 154.592,93.709 154.592,71.692 153.4,70.5 v1(153.4,69.8)
  Bottom Side w0.254: U2.18@147.85,67.2 149.8,67.2 152.4,69.8 v1(153.4,69.8)
  Bottom Side w0.508: Q8.4@136.3,85.61 137.29,86.6 v2(137.3,86.6)
NetQ9_4: Q9.4 U2.16 | length 54.2
  Top Side w0.508: v2(137.5,92.4) 139.6,92.4 141.392,94.192 141.392,95.293 142.715,96.616 152.687,96.616 155.3,94.003 155.3,71.2 v1(154.5,70.4)
  Bottom Side w0.254: U2.16@147.85,68.5 150.242,68.5 152.142,70.4 v1(154.5,70.4)
  Bottom Side w0.508: Q9.4@136.3,91.61 137.09,92.4 v2(137.5,92.4)
NetQ10_4: Q10.4 U2.14 | length 44.4
  Top Side w0.508: v2(143.1,94.7) 143.6,95.2 152.1,95.2 153.884,93.416 153.884,72.684 153.4,72.2 v1(153.4,71.6)
  Bottom Side w0.254: U2.14@147.85,69.8 150.2,69.8 152,71.6 v1(153.4,71.6)
  Bottom Side w0.508: v2(143.1,94.7) 143.1,92.6 143.9,91.8 Q10.4@144.99,91.8
NetR8_2: R8.2 U14.1 | length 2.1
  Bottom Side w0.2: R8.2@98.7,21.7 99.8,21.7 100.2,22.1 U14.1@100.6,22.1
NetR17_2: R17.2 U3.5 | length 2.7
  Top Side w0.254: R17.2@142.8,48.6 143.4,48.6 144.2,49.4 U3.5@145.15,49.4
NetR18_1: R18.1 U3.6 | length 3.4
  Top Side w0.254: v1(145.8,48.1) U3.6@145.8,49.4
  Bottom Side w0.254: v1(145.8,48.1) 146.1,48.4 R18.1@146.1,50.1
NetR19_1: R19.1 R20.2 R22.1 | length 4.3
  Top Side w0.254: R20.2@144.8,43.8 R19.1@146.5,43.8 146.8,43.8 R22.1@148.4,45.4
NetR19_2: R19.2 U3.8 | length 4.2
  Top Side w0.254: R19.2@146.5,45.4 146.5,47.1 147.1,47.7 U3.8@147.1,49.4
NetR26_2: R26.2 R27.1 U2.6 | length 5.4
  Top Side w0.254: R27.1@137.8,63.7 R26.2@137.8,65.6 138.8,66.6 v1(139.3,66.6)
  Bottom Side w0.254: v1(139.3,66.6) U2.6@140.85,66.6
NetR31_2: R31.2 R33.2 U2.9 | length 6.5
  Top Side w0.254: v1(142.4,69) 142.7,69.3 143.4,69.3 143.7,69.6 R33.2@143.7,70.4 145.3,72 R31.2@145.5,72
  Bottom Side w0.254: U2.9@140.9,68.5 141.9,68.5 v1(142.4,69)
NetR32_2: R32.2 U4.5 | length 2.7
  Top Side w0.254: R32.2@142.8,30.9 143.5,30.9 144.4,31.8 U4.5@145.15,31.8
NetR36_1: R36.1 U4.6 | length 3.5
  Top Side w0.254: v1(145.8,30.4) U4.6@145.8,31.8
  Bottom Side w0.254: v1(145.8,30.4) 146.1,30.7 R36.1@146.1,32.4
NetR37_1: R37.1 R38.2 R39.1 | length 4.4
  Top Side w0.254: R38.2@144.7,25.9 R37.1@146.5,25.9 146.8,25.9 R39.1@148.4,27.5
NetR37_2: R37.2 U4.8 | length 4.5
  Top Side w0.254: R37.2@146.5,27.5 146.5,29.1 147.1,29.7 U4.8@147.1,31.8
NetR73_2: R73.2 U9.47 | length 5.9
  Top Side w0.2: R73.2@26.6,109.9 26.6,108.7 27,108.3 28.9,108.3 29.75,107.45 U9.47@29.75,106.45
NetR74_2: R74.2 U9.15 | length 3.4
  Top Side w0.2: v1(29.1,95.8) 29.7,96.4 30.05,96.4 30.25,96.6 U9.15@30.25,97.45
  Bottom Side w0.2: R74.2@29.1,94.7 v1(29.1,95.8)
NetR75_1: R75.1 U9.38 | length 6
  Top Side w0.2: U9.38@34.25,106.45 34.25,107.55 34.7,108 36.9,108 37.4,108.5 R75.1@37.4,109.9
NetR76_1: R76.1 U9.40 | length 3.7
  Top Side w0.2: U9.40@33.25,106.45 33.25,107.75 33.8,108.3 R76.1@33.8,109.9
NetR77_2: R77.2 R78.2 U8.1 | length 3.7
  Bottom Side w0.2: U8.1@42.9,107.8 R77.2@44.8,107.8 R78.2@44.8,109.6
NetR79_1: R79.1 U9.39 | length 4.5
  Top Side w0.2: U9.39@33.75,106.45 33.75,107.684 34.466,108.4 34.9,108.4 35.6,109.1 R79.1@35.6,109.9
NetR80_1: R80.1 U9.41 | length 3.8
  Top Side w0.2: R80.1@32,109.9 32,108.7 32.75,107.95 U9.41@32.75,106.45
NetR81_1: R81.1 U9.44 | length 4
  Top Side w0.2: R81.1@30.2,109.9 30.2,109.1 31.35,107.95 31.35,107.372 31.25,107.272 U9.44@31.25,106.45
NetR82_1: R82.1 U9.46 | length 4.2
  Top Side w0.2: R82.1@28.4,109.9 28.5,109.8 28.5,109.266 30.25,107.516 U9.46@30.25,106.45
NetR91_2: R91.2 U13.20 | length 2
  Top Side w0.2: R91.2@97.925,64.025 U13.20@97.925,65.975
NetR92_1: R92.1 U13.1 | length 2
  Top Side w0.2: R92.1@103.475,64.025 U13.1@103.475,65.975
NetR94_2: R94.2 U13.19 | length 7.8
  Top Side w0.2: R94.2@93.8,62.2 95.3,62.2 96.2,63.1 96.2,66.3 96.525,66.625 U13.19@97.925,66.625
NetR95_2: R95.2 U13.18 | length 6.5
  Top Side w0.2: R95.2@93.8,64 95.1,64 95.8,64.7 95.8,66.466 96.609,67.275 U13.18@97.925,67.275
NetR96_2: R96.2 R98.2 U13.17 | length 6.1
  Top Side w0.2: R98.2@93.8,65.8 R96.2@93.8,67.6 95.8,67.6 96.125,67.925 U13.17@97.925,67.925
NetR97_1: R97.1 U13.9 | length 3.7
  Top Side w0.2: R97.1@102,73.6 102,71.5 102.325,71.175 U13.9@103.475,71.175
NetR97_2: R97.2 R100.1 U13.10 | length 3.4
  Top Side w0.2: U13.10@103.6,71.95 R100.1@103.6,75.4
NetR101_2: R101.2 R102.2 U13.16 | length 6.3
  Top Side w0.2: R102.2@93.8,71.2 R101.2@93.8,69.4 95.3,69.4 96.125,68.575 U13.16@97.925,68.575
NetR103_1: R103.1 U13.12 | length 3.9
  Top Side w0.2: U13.12@97.925,71.175 99.175,71.175 99.5,71.5 99.5,73.5 R103.1@99.4,73.6
NetR103_2: R103.2 R104.1 U13.11 | length 3.4
  Top Side w0.2: U13.11@97.925,71.825 R104.1@97.925,75.275
NetR113_1: R113.1 R114.1 U16.1 U16.4 | length 9.7
  Bottom Side w0.2: U16.1@32.4,113.695 29.65,113.695 29.3,114.045 R113.1@29.3,114.7 R114.1@29.3,116.5 29.3,117.25 29.555,117.505 U16.4@32.4,117.505
NetU9_7: U9.7 U9.8 | length 2.7
  Top Side w0.2: U9.8@27.5,101.2 26.4,101.2 26.4,101.7 U9.7@27.5,101.7
NetU14_5: U14.5 U21.4 | length 3
  Bottom Side w0.2: U21.4@100.4,17.1 101.2,17.1 101.6,17.5 U14.5@101.6,19.1
NetU18_2: U18.2 Y4.1 | length 8.8
  Top Side w0.2: U18.2@90.065,84.3 90.065,82.735 91,81.8 93.3,81.8 93.75,81.35 93.75,79.75 93.5,79.5 Y4.1@92.5,79.5
OUT1: C86.1 C87.1 J9.5 U16.8 | length 0.3
  Bottom Side w1: C86.1@45.65,124.2 C86.1@45.85,124
OUT2: C103.1 C105.1 J9.1 U16.5
PCM-CLK: J5.45 R94.1 | length 4.9
  Top Side w0.2: R94.1@92.2,62.2 92.2,61.3 93.7,59.8 J5.45@93.7,57.9
PCM-DIN: J5.49 R96.1 R102.1 | length 22.7
  Top Side w0.2: J5.49@92.1,57.9 92.1,56.55 91.7,56.15 90.8,56.15 90.3,56.65 90.3,59.4 89.2,60.5 89.2,66 90.8,67.6 ; R96.1@92.2,67.6 90.8,67.6 ; R102.1@92.2,71.2 90.6,71.2 90.2,70.8 90.2,68.1 90.7,67.6 90.8,67.6
PCM-DOUT: J5.47 R98.1 R101.1 | length 14.7
  Top Side w0.2: v1(91,65.8) R98.1@92.2,65.8 ; v1(91,69.4) R101.1@92.2,69.4 ; J5.47@92.9,57.9 v1(92.9,59.7)
  Bottom Side w0.2: v1(91,69.4) v1(91,65.8) 91,64.7 92.9,62.8 v1(92.9,59.7)
PCM-SYNC: J5.51 R95.1 | length 8.1
  Top Side w0.2: J5.51@91.3,57.9 91.3,59.7 90.2,60.8 90.2,63.3 90.9,64 R95.1@92.2,64
PWR-IN: C5.1 C6.2 C7.2 D1.1 D2.1 Q10. Q10.5 Q10.6 Q10.7 Q10.8 R23.2 R29.1 | length 2.7
  Top Side w0.5: v1(145.6,62.9) R29.1@145.6,64.3 ; v3(152,67.8) 152.5,67.3 R23.2@152.5,66.7
  other v1: 138.3,105.2 139.1,105.2 139.9,105.2 140.7,105.2 141.5,105.2 142.3,105.2 138.3,106.1 139.1,106.1 139.9,106.1 140.7,106.1 141.5,106.1 142.3,106.1 138.3,107 139.1,107 139.9,107 140.7,107 141.5,107 142.3,107 138.3,107.9 139.1,107.9 139.9,107.9 140.7,107.9 141.5,107.9 142.3,107.9 138.3,108.8 139.1,108.8 139.9,108.8 140.7,108.8 141.5,108.8 142.3,108.8
PWR-LED: D18.2 U5.23 | length 9.1
  Top Side w0.2: U5.23@111.2,106.9 111.2,108.1 111.5,108.4 113,108.4 114.9,106.5 114.9,105.4 115.6,104.7 D18.2@116.8,104.7
REC-LED: D16.2 U5.21 | length 9.2
  Top Side w0.2: U5.21@113.2,104.1 114.934,104.1 116.034,103 120,103 120.6,103.6 D16.2@120.6,104.7
REV-SIG: Q6.1 R50.2 U5.30 | length 47.6
  Top Side w0.2: U5.30@105.6,106.9 105.6,108.3 106,108.7 R50.2@106,109.6 106.8,109.6 107.35,110.15 107.35,113.05 v1(107.05,113.35) ; v1(108.6,113.35) 127.25,113.35 132.1,118.2 132.1,120.6 134.35,122.85 138.8,122.85 v1(139.65,123.7)
  Bottom Side w0.2: v1(107.05,113.35) v1(108.6,113.35) ; v1(139.65,123.7) Q6.1@139.65,125.253
RS232-P1-RXD: J13.4 U20.18 | length 6.4
  Top Side w0.2: v1(125.6,114.9) 126.7,116 J13.4@126.7,117.7
  Bottom Side w0.2: U20.18@125.3,111.9 125.3,114.6 v1(125.6,114.9)
RS232-P1-TXD: J13.2 U20.21 | length 6.6
  Bottom Side w0.2: U20.21@127.25,111.9 127.25,115.75 J13.2@129.2,117.7
RS232-P2-RXD: J13.10 U20.17 | length 9.7
  Bottom Side w0.2: J13.10@119.2,117.7 120.8,116.1 122.334,116.1 122.734,115.7 124,115.7 124.65,115.05 U20.17@124.65,111.9
RS232-P2-TXD: J13.8 U20.20 | length 9.4
  Bottom Side w0.2: J13.8@121.7,117.7 121.7,117.3 122.9,116.1 125.5,116.1 126.6,115 U20.20@126.6,111.9
RS232-P3-RXD: J13.3 U20.16 | length 9.9
  Top Side w0.2: v1(124,114.1) 124,114.9 125.4,116.3 125.4,119.4 J13.3@126.7,120.7
  Bottom Side w0.2: U20.16@124,111.9 v1(124,114.1)
RS232-P3-TXD: J13.1 U20.19 | length 10.1
  Top Side w0.2: v1(126,114.2) 128,116.2 128,119.5 J13.1@129.2,120.7
  Bottom Side w0.2: U20.19@125.95,111.9 125.95,114.15 v1(126,114.2)
RST: U5.4 U6.2 | length 11.7
  Top Side w0.2: U5.4@105.6,94.9 105.6,89.8 104.3,88.5 104.3,85.6 105.15,84.75 U6.2@105.8,84.75
RST#: C96.1 R109.1 U13.2 | length 6.6
  Top Side w0.2: v1(101.8,66.6) 101.825,66.625 U13.2@103.475,66.625
  Bottom Side w0.2: v1(101.8,66.6) 103.326,66.6 103.426,66.5 103.7,66.5 104,66.2 C96.1@104,65.5 R109.1@104,63.7
RUN-LED: D17.2 U5.22 | length 7.2
  Top Side w0.2: U5.22@113.2,104.9 114.7,104.9 116.2,103.4 118.3,103.4 118.7,103.8 D17.2@118.7,104.7
SD-CARDIN: M1.B5 Q11.1 R70.2 R71.2 | length 110.8
  Top Side w0.2: v1(68.9,115.1) v1(68.9,118.65)
  Bottom Side w0.2: R70.2@50.7,110.85 R70.2@50.9,110.85 ; R70.2@50.95,110.85 51.2,110.85 R71.2@52.8,112.45 52.8,114.168 ; Q11.1@51.865,114.218 54.182,114.218 54.75,113.65 54.75,113.572 55.272,113.05 56.85,113.05 57.3,113.5 60.847,113.5 62.597,115.25 65.193,115.25 65.511,115.568 68.432,115.568 v1(68.9,115.1) ; v1(68.9,118.65) 69.018,118.65 69.3,118.368 76.484,118.368 80.251,114.6 82.451,114.6 86.4,110.651 86.4,79.823 84.85,78.273 84.85,52.8 84.022,51.972 M1.B5@80.452,51.972
SD-CLK: J4.5 M1.B11 | length 92.9
  Top Side w0.2: v1(56.1,113.8) v1(56.1,115.65)
  Bottom Side w0.2: v1(56.1,113.8) 56.2,113.9 60.681,113.9 62.431,115.65 65.028,115.65 65.346,115.968 75.489,115.968 79.257,112.2 81.457,112.2 84,109.657 84,80.817 82.45,79.267 82.45,58.4 82.022,57.972 M1.B11@80.452,57.972 ; v1(56.1,115.65) 56.1,118.25 56.8,118.95 J4.5@56.8,120.9
SD-CMD: J4.3 M1.B12 | length 93.7
  Top Side w0.2: v1(64.8,116.2) v1(64.8,118.65)
  Bottom Side w0.2: J4.3@59,120.9 59,122.4 59.5,122.9 61,122.9 62.466,122.9 63.45,121.916 63.45,119.1 63.9,118.65 v1(64.8,118.65) ; v1(64.8,116.2) 64.968,116.368 75.655,116.368 79.423,112.6 81.623,112.6 84.4,109.823 84.4,80.651 82.85,79.101 82.85,57.55 82.272,56.972 79.452,56.972 M1.B12@78.452,57.972